# EAGLE board bugs (EAGLE 9.6.2)
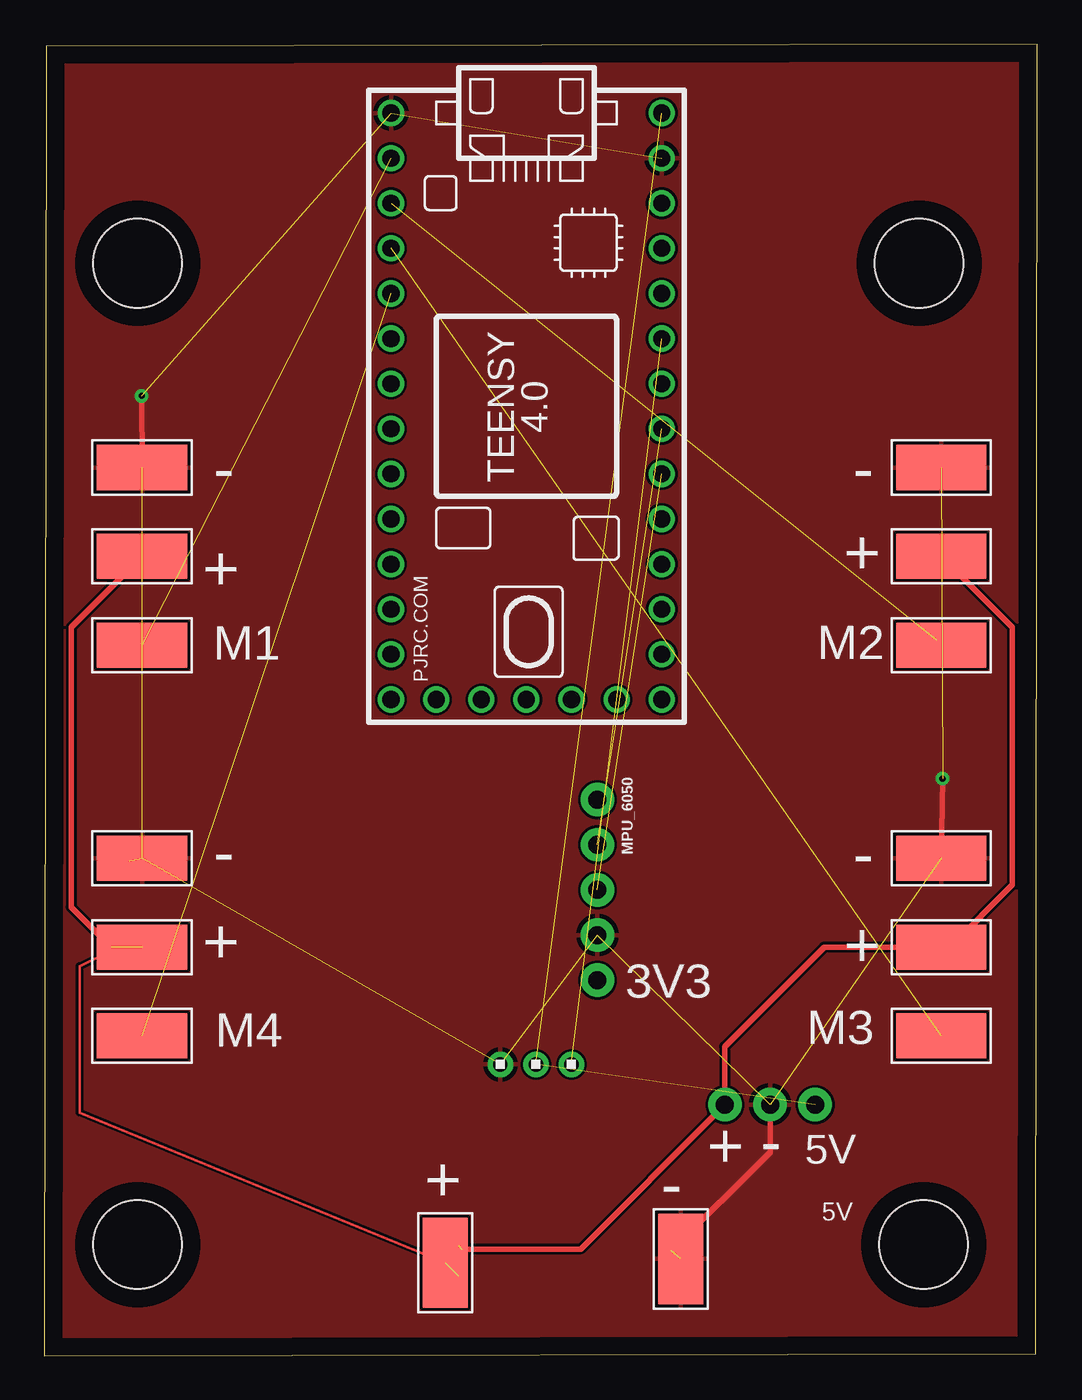
[diagram p0: board, top side]

Size 55.9 x 73.82 mm. Coordinates in mm from the lower left corner, seen from the top.
Outline: 0,0 55.8,0.1 55.9,73.82 0.1,73.72 0,0
Copper layers (1*16): Top 0.035mm / dielectric 1.5mm / Bottom 0.035mm
Design rules "default": minimum track width 6mil, minimum drill 0.35mm, track to track 6mil, track to pad 6mil, pad to pad 6mil, via to via 6mil, smd to smd 6mil, copper to edge 40mil, drill to drill 6mil, minimum pad ring 10mil, minimum via ring 8mil, stop-mask expansion 4mil, vias tented up to drill 0mil, thermal gap 10mil
Holes 5 mm at 5.25,6.25 49.5,6.25 5.25,61.5 49.25,61.5

## Footprints (pad centres in the part's own frame; a part is rotated, then mirrored left to right if it is on the bottom)
5-2,5 = smd 2.54 x 5.08: 1 0,0
1X05_NO_SILK = drill 1.016 pad 1.88: 1 0,0; 2 2.54,0; 3 5.08,0; 4 7.62,0; 5 10.16,0
1X03_NO_SILK = drill 1.016 pad 1.88: 1 0,0; 2 2.54,0; 3 5.08,0
1X3 = drill 0.8 pad 1.422: 1 -2,0; 2 0,0; 3 2,0
TEENSY_4.0 = drill 0.965: 0/RX -13.97,-7.62; 1/TX -11.43,-7.62; 2 -8.89,-7.62; 3/CANTX -6.35,-7.62; 3V3_LN 16.51,-2.54; 3V3_LO -11.43,7.62; 4/CANRX -3.81,-7.62; 5 -1.27,-7.62; 6 1.27,-7.62; 7 3.81,-7.62; 8 6.35,-7.62; 9/CS 8.89,-7.62; 10/CS 11.43,-7.62; 11/MOSI 13.97,-7.62; 12/MISO 16.51,-7.62; 13/SCK 16.51,7.62; 14/A0 13.97,7.62; 15/A1 11.43,7.62; 16/A2 8.89,7.62; 17/A3 6.35,7.62; 18/A4/SDA 3.81,7.62; 19/A5/SCL 1.27,7.62; 20/A6 -1.27,7.62; 21/A7 -3.81,7.62; 22/A8 -6.35,7.62; 23/A9 -8.89,7.62; GND -16.51,-7.62; GND2 -13.97,7.62; GND3 16.51,0; ON/OFF 16.51,5.08; PROG 16.51,2.54; VBAT\ 16.51,-5.08; VIN -16.51,7.62

## Placement (x,y rotation side)
GND  WIREPADSMD5-2,5  [5-2,5]  35.83,5.44 0 top
GND1  WIREPADSMD5-2,5  [5-2,5]  5.5,50 90 top
GND2  WIREPADSMD5-2,5  [5-2,5]  50.5,28 90 top
GND3  WIREPADSMD5-2,5  [5-2,5]  50.5,50 90 top
GND4  WIREPADSMD5-2,5  [5-2,5]  5.5,28 90 top
M1  WIREPADSMD5-2,5  [5-2,5]  5.5,40 90 top
M2  WIREPADSMD5-2,5  [5-2,5]  50.5,40 90 top
M3  WIREPADSMD5-2,5  [5-2,5]  50.5,18 90 top
M4  WIREPADSMD5-2,5  [5-2,5]  5.5,18 90 top
MPU_6050  [1X05_NO_SILK]  31.14,31.3 270 top
REG  REG  [1X03_NO_SILK]  43.4,14.13 180 top
SBUS_RX  1X3  [1X3]  27.67,16.39 0 top
U$1  TEENSY_4.0  [TEENSY_4.0]  27.14,53.45 270 top
VBAT  WIREPADSMD5-2,5  [5-2,5]  22.58,5.23 0 top
VBAT1  WIREPADSMD5-2,5  [5-2,5]  5.5,45 90 top
VBAT2  WIREPADSMD5-2,5  [5-2,5]  50.5,23 90 top
VBAT3  WIREPADSMD5-2,5  [5-2,5]  50.5,45 90 top
VBAT4  WIREPADSMD5-2,5  [5-2,5]  5.5,23 90 top

## Library data of the parts
GND GND1-GND4 M1-M4 VBAT VBAT1-VBAT4 = wirepad
MPU_6050 REG = SparkFun-Connectors
SBUS_RX = headers(2mm)
U$1 = TEENSY 4.0

## Nets
3V3: MPU_6050.5
5V: REG.1 SBUS_RX.2 U$1.VIN
GND: GND1.1 GND2.1 GND3.1 GND4.1 GND.1 MPU_6050.4 REG.2 SBUS_RX.1 U$1.GND U$1.GND2
IMU_INT: MPU_6050.1
M1: M1.1 U$1.0/RX
M2: M2.1 U$1.1/TX
M3: M3.1 U$1.2
M4: M4.1 U$1.3/CANTX
RX5: SBUS_RX.3 U$1.21/A7
SCL: MPU_6050.2 U$1.19/A5/SCL
SDA: MPU_6050.3 U$1.18/A4/SDA
VBAT: REG.3 VBAT1.1 VBAT2.1 VBAT3.1 VBAT4.1 VBAT.1

## Tracks (layer width: path | path; a pad name or v marks a point on that pad's centre or on a via)
5V  (2 unrouted)
GND  (via drill 0.35)  (10 unrouted)
  Top 0.152: GND1.1 7.4,50 | 4.05,27.87 4.79,27.87
  Top 0.305: REG.2 40.85,11.46 35.3,5.9 | GND1.1 v5.48,54.03 | GND2.1 v50.57,32.48
  pour Top: 0.25,73.78 55.9,73.78 55.9,-0.25 0.25,-0.25
M1  (1 unrouted)
M2  (1 unrouted)
  Top 0.152: 50.2,40.3 M2.1
M3  (1 unrouted)
M4  (1 unrouted)
RX5  (1 unrouted)
SCL  (1 unrouted)
SDA  (1 unrouted)
VBAT  (3 unrouted)
  Top 0.152: 23.3,6.2 23.3,4.5 | 38.3,14.11 37.99,13.81 | 51,23 49,23 48.51,23 49.11,23 | VBAT3.1 49,45 | 3.75,23 3.75,22.79 | 3.75,22.79 3.75,22.5 | VBAT.1 1.98,13.67 1.98,21.93 3.75,22.79
  Top 0.305: REG.3 37.99,13.81 30.19,6 23.5,6 | VBAT2.1 49.11,23 49,23 43.9,23 38.3,17.4 38.3,14.11 | VBAT1.1 1.5,41 1.5,25.25 3.75,23 | VBAT4.1 6.5,23 | VBAT3.1 54.5,41 54.5,26.5 51,23

## Text on the board
tNames: - | - | + | + | M1 | M2 | - | - | + | + | 3V3 | M3 | M4 | + | - | 5V | + | - | 5V